# EAGLE board S016 Breakout Board v2 (EAGLE 7.3.0)
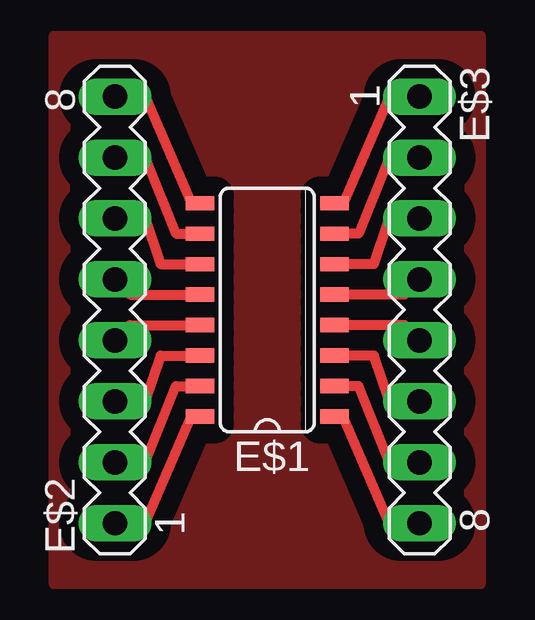
[diagram p0: board, top side]

No outline drawn. Coordinates in mm, seen from the top.
Copper layers (1*16): Top 0.035mm / dielectric 1.5mm / Bottom 0.035mm
Design rules "default": minimum track width 10mil, minimum drill 24mil, track to track 8mil, track to pad 8mil, pad to pad 8mil, via to via 8mil, smd to smd 8mil, copper to edge 40mil, drill to drill 8mil, minimum pad ring 10mil, minimum via ring 8mil, stop-mask expansion 4mil, vias tented up to drill 0mil, thermal gap 10mil

## Footprints (pad centres in the part's own frame; a part is rotated, then mirrored left to right if it is on the bottom)
SO16 = smd 0.6 x 1.2: 1 -4.445,-2.8; 2 -3.175,-2.8; 3 -1.905,-2.8; 4 -0.635,-2.8; 5 0.635,-2.8; 6 1.905,-2.8; 7 3.175,-2.8; 8 4.445,-2.8; 9 4.445,2.8; 10 3.175,2.8; 11 1.905,2.8; 12 0.635,2.8; 13 -0.635,2.8; 14 -1.905,2.8; 15 -3.175,2.8; 16 -4.445,2.8
MA08-1 = drill 1.016 long: 1 -8.89,0; 2 -6.35,0; 3 -3.81,0; 4 -1.27,0; 5 1.27,0; 6 3.81,0; 7 6.35,0; 8 8.89,0

## Placement (x,y rotation side)
E$1  [SO16]  8.89,11.43 90 top
E$2  [MA08-1]  2.54,11.43 90 top
E$3  [MA08-1]  15.24,11.43 270 top

## Library data of the parts
E$1 = SparkFun-AnalogIC
E$2 E$3 = con-lstb

## Tracks (layer width: path | path; a pad name or v marks a point on that pad's centre or on a via)
S$1
  Top 0.406: 3.81,2.54 5.71,6.99
S$2
  Top 0.406: 3.81,5.08 5.08,8.26 5.71,8.26
S$3
  Top 0.406: 3.81,7.62 4.45,9.53 5.71,9.53
S$4
  Top 0.406: 3.17,10.16 3.17,10.79 5.71,10.79
S$5
  Top 0.406: 3.17,12.7 3.17,12.06 5.71,12.06
S$6
  Top 0.406: 3.81,15.24 4.45,13.34 6.35,13.34
S$7
  Top 0.406: 3.81,17.78 5.08,14.61 5.71,14.61
S$8
  Top 0.406: 3.81,20.32 5.71,15.88
S$9
  pour Top (isolate 0.813): 0,0 0,22.86 17.78,22.86 17.78,0
S$10
  Top 0.406: 13.97,20.32 12.06,15.88
S$11
  Top 0.406: 13.97,17.78 12.7,14.61 12.06,14.61
S$12
  Top 0.406: 13.97,15.24 13.34,13.34 12.06,13.34
S$13
  Top 0.406: 14.61,12.7 14.61,12.06 12.06,12.06
S$14
  Top 0.406: 14.61,10.16 14.61,10.79 12.06,10.79
S$15
  Top 0.406: 13.97,7.62 13.34,9.53 12.06,9.53
S$16
  Top 0.406: 13.97,5.08 12.7,8.26 12.06,8.26
S$17
  Top 0.406: 13.97,2.54 12.06,6.99